# Altium PCB main_pcb_new_id.PcbDoc (part 2 of 2)
Units mil, origin at the board's own origin, x right, y up, seen from the top; angles counter-clockwise.
Board outline 3546.59 x 5237.31 mil, 2 copper layers (Top Layer, Bottom Layer); 115 components, 100 nets, 461 pads, 134 vias.
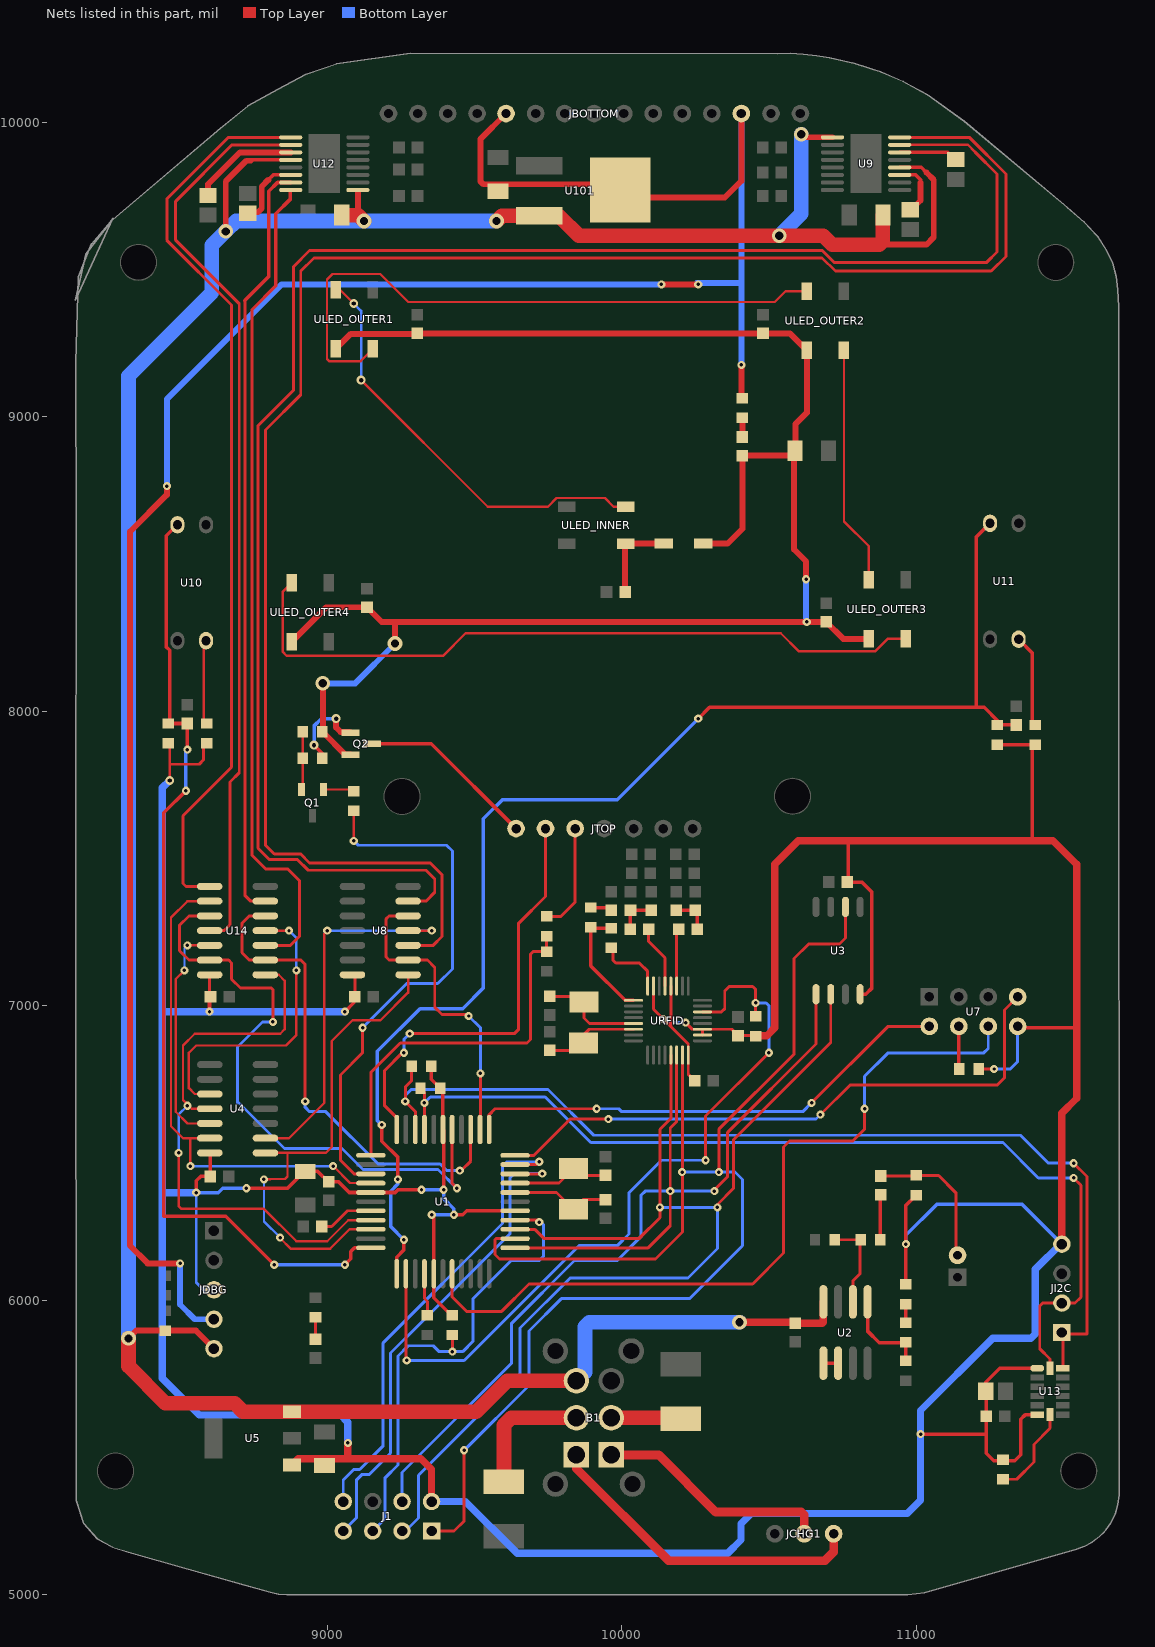
[diagram p2: the nets of this part, all layers, seen from the top]

## Via types
v1: diameter 27.56, hole 11.81, Top Layer to Bottom Layer, 97 vias
v2: diameter 50, hole 28, Top Layer to Bottom Layer, 17 vias
v3: diameter 25.98, hole 12.99, Top Layer to Bottom Layer, tented top, 8 vias
v4: diameter 30, hole 15, Top Layer to Bottom Layer, 7 vias
v5: diameter 20, hole 10, Top Layer to Bottom Layer, 3 vias
v6: diameter 27.6, hole 11.81, Top Layer to Bottom Layer, 2 vias

## Nets (pads, with @x,y where several pads share a name; then routed paths per layer and width w, separated by ;. In a path a pad name is that pad's centre, name@x,y a point inside that pad or via, vN(x,y) a via of type N, cw(c..) or ccw(c..) an arc to the next point about the centre after c; other vN are vias at no path point) (continued)
MISO: J1.1 U1.2 U3.2 URFID.31 | length 4691.7
  Top Layer w10: J1.1@9354.22,5215.85 9430.85,5215.85 9465,5250 v1(9465,5490) ; U1.2@9637.95,6208.55 9573.55,6208.55 9570,6205 9570,6155 9585,6140 10115,6140 10206.34,6231.34 URFID.31@10206.34,6832.4 ; v1(10330,6435) 10330,6580 10585,6835 10585,7160 10635,7210 10740,7210 10760.04,7230.04 U3.2@10760.04,7335.54
  Bottom Layer w10: v1(9465,5490) 9685,5710 9685,5895 9795,6005 10230,6005 10410,6185 10410,6410 10385,6435 v1(10330,6435) 10215,6435 10210,6430 v1(10205,6435)
MOSI: J1.4 U1.1 U3.5 URFID.30 | length 3674.8
  Top Layer w10: U1.1@9637.95,6177.55 10090,6177.55 10165,6252.55 v1(10165,6370) 10165,6585 10186.65,6606.65 URFID.30@10186.65,6832.4 ; v1(10315,6370) 10315,6375 10360,6420 10360,6570 10660.04,6870.04 U3.5@10660.04,7038.85
  Bottom Layer w10: J1.4@9254.22,5315.85 9254.22,5414.22 9625,5785 9625,5920 9840,6135 9985,6135 10065,6215 10065,6355 10080,6370 v1(10165,6370) v1(10315,6370)
MTR_L_DIR: U1.30 U4.11 U14.1 | length 1979.8
  Top Layer w8: v1(8495,6500) 8495,6320 8505,6310 8785,6310 8895,6200 9000,6200 9071.55,6271.55 U1.30@9147.95,6271.55 ; U4.11@8601.02,6650 8540,6650 8510,6680 8510,6865 8550,6905 8840,6905 8855,6920 8855,7085 8835,7105 U14.1@8789.49,7105
  Bottom Layer w8: v1(8495,6500) 8495,6630 v1(8525,6660)
MTR_L_EN: U1.14 U14.2 U14.5 | length 1678.3
  Top Layer w10: U14.5@8789.49,7305 8735,7305 8710,7280 8710,7180 8735,7155 U14.2@8789.49,7155 8910,7155 8925,7140 v1(8925,6675) ; v1(9450,6440) 9455,6440 9486.95,6471.95 U1.14@9486.95,6579.55
  Bottom Layer w10: v1(8925,6675) 8925,6655 8940,6640 8995,6640 9173,6462 9383.46,6462 9405.46,6440 v1(9450,6440)
MTR_L_ENC: C47.2 R21.1 U1.34 U11.3 | length 4490
  Top Layer w12: v1(9185,6595) 9185,6540 9240,6485 v1(9240,6410) ; U1.34@9235.95,6089.55 9235.95,6145.95 9260,6170 v1(9260,6205) ; v1(10260,7975) 10298.46,8013.46 11205,8013.46 ; U11.3@11251.12,8638.47 11205,8592.35 11205,8013.46 ; C47.2@11340,7953.5 11280.04,7953.5 11280,7953.46 11280,7965 11231.54,8013.46 11205,8013.46
  Bottom Layer w12: v1(9185,6595) 9170,6610 9170,6845 9315,6990 9460,6990 9530,7060 9530,7635 9595,7700 9985,7700 v1(10260,7975) ; v1(9240,6410) 9240,6395 9215,6370 9215,6250 v1(9260,6205)
MTR_R_DIR: U1.31 U4.1 U8.1 | length 1718.6
  Top Layer w8: v1(8785,6410) 8805,6410 8806.25,6411.25 8856.25,6411.25 8865,6420 8865,6500 ; U4.1@8790,6500 8865,6500 ; v1(8840,6212.5) 8840,6210 8875,6175 9010,6175 9075.55,6240.55 U1.31@9147.95,6240.55 ; U8.1@9274.49,7105 9274.49,7044.49 9180,6950 9131.46,6950 9130.68,6950.78 9085.78,6950.78 9015,6880 9015,6520 8995,6500 8865,6500
  Bottom Layer w8: v1(8785,6410) 8785,6267.5 v1(8840,6212.5)
MTR_R_EN: U1.13 U8.2 U8.5 | length 1053
  Top Layer w10: U8.5@9274.49,7305 9210,7305 9200,7295 9200,7165 9210,7155 U8.2@9274.49,7155 9340,7155 9365,7130 9365,6995 9390,6970 9475,6970 v1(9480,6965) ; U1.13@9518.95,6579.55 9520,6580.6 v1(9520,6770)
  Bottom Layer w10: v1(9480,6965) 9520,6925 v1(9520,6770)
MTR_R_ENC: C46.2 R20.1 U1.33 U10.3 | length 3268.9
  Top Layer w12: U10.3@8491.12,8633.47 8453.5,8595.84 8453.5,8218.28 8465,8206.78 8465,7963.46 8470,7958.46 8470.04,7958.5 C46.2@8525,7958.5 v1(8525,7870) ; v1(8520,7730) 8445,7655 8445,6285 8655,6285 v1(8820,6120) ; v6(9060,6120) 9080,6140 9080,6165 9092.55,6177.55 U1.33@9147.95,6177.55
  Bottom Layer w12: v1(8520,7730) 8520,7865 v1(8525,7870) ; v1(8820,6120) v6(9060,6120)
NetB1_1: B1.1 JCHG1.3 | length 1123.6
  Top Layer w30: B1.1@9846.2,5474.26 9846.2,5428.06 10159.25,5115 10690,5115 10720,5145 JCHG1.3@10720,5206.54
NetB1_2: B1.2 F1.2 | length 449.1
  Top Layer w50: F1.2@9600,5382.52 9600,5575 9625.24,5600.24 B1.2@9846.2,5600.24
NetB1_5: B1.5 F2.2 | length 241.2
  Top Layer w10: F2.2@10197.24,5600.24 F2.2@10200,5597.48
  Top Layer w50: B1.5@9960,5600 9960.24,5600.24 B1.5@9964.31,5600.24 F2.2@10197.24,5600.24
NetB1_6: B1.6 JCHG1.2 | length 803.8
  Top Layer w30: B1.6@9964.31,5474.26 10125.74,5474.26 10320,5280 10546.54,5280 10610,5280 10620,5270 JCHG1.2@10620,5206.54
NetC2_2: C2.2 U1.7 XTAL1.2 | length 344.4
  Top Layer w10: U1.7@9637.95,6365.55 9778.94,6365.55 XTAL1.2@9836.06,6308.43 9869.13,6341.5 C2.2@9945,6341.5
NetC3_1: C3.1 R11.1 | length 155.6
  Top Layer w12: R11.1@10878.46,6205 10878.46,6358.46 C3.1@10880,6360
NetC3_2: C3.2 MK1.1 R10.2 | length 501.9
  Top Layer w10: C3.2@10880,6421.5 10998.5,6421.5 R10.2@11000,6420 ; R10.2@11000,6423.46 11076.54,6423.46 11135,6365 11135,6150 MK1.1@11140,6145
NetC4_2: C4.2 U1.8 XTAL1.1 | length 337.4
  Top Layer w10: U1.8@9637.95,6397.55 9787.39,6397.55 XTAL1.1@9837.05,6447.2 9860.75,6423.5 C4.2@9945,6423.5
NetC7_1: C7.1 U1.29 | length 195.1
  Top Layer w10: C7.1@8975,6250 C7.1@8981.5,6250 9015,6250 9068.55,6303.55 U1.29@9147.95,6303.55
NetC9_1: C9.1 URFID.22 XRFID.2 | length 330.8
  Top Layer w10: C9.1@9755,6848.5 9846.14,6848.5 XRFID.2@9871.06,6873.43 9871.06,6901.06 9890,6920 URFID.22@10040,6920
NetC10_1: C10.1 URFID.21 XRFID.1 | length 350.6
  Top Layer w10: C10.1@9755,7031.5 9845.55,7031.5 9872.05,7005 9872.05,6957.95 9890.31,6939.69 URFID.21@10040,6939.69
NetC12_1: C12.1 D1.1 ULED_INNER.1 | length 284.4
  Top Layer w20: C12.1@10011.5,8415 10011.5,8566.26 ULED_INNER.1@10014.17,8568.94 10015.24,8570 D1.1@10143.07,8570
NetC21_1: C21.1 R16.1 | length 74.1
  Top Layer w12: R16.1@9895,7333.46 9955.04,7333.46 C21.1@9965,7323.5
NetC22_1: C22.1 C24.2 L2.2 | length 131.2
  Top Layer w12: C24.2@10185,7323.5 C22.1@10250,7323.5 10256.5,7317.01 L2.2@10256.5,7260
NetC25_2: C25.2 U9.11 | length 197.2
  Top Layer w12: U9.11@10944.17,9821.61 10998.39,9821.61 11015,9805 11015,9795
  Top Layer w20: C25.2@10980,9700 11015,9735 11015,9795
NetC30_2: C30.2 U9.14 | length 202.6
  Top Layer w12: U9.14@10944.17,9898.39 11106.61,9898.39 C30.2@11135,9870
NetC33_2: C33.2 U12.11 | length 365.7
  Top Layer w20: C33.2@8595,9750 C33.2@8595,9751.93 8595,9790 8703,9898 8875.44,9898 U12.11@8875.83,9898.39
NetC39_2: C39.2 U12.14 | length 242.2
  Top Layer w12: 8800,9805 8816.61,9821.61 U12.14@8875.83,9821.61
  Top Layer w20: C39.2@8730,9695 8765,9695 8777.53,9707.53 8777.53,9782.53 8800,9805
NetC42_1: C42.1 C45.1 L3.2 | length 134.1
  Top Layer w12: L3.2@10028.5,7260 10028.5,7322.01 C45.1@10030,7323.5 C42.1@10100,7323.5
NetDLED_2: DLED.2 R27.1 | length 75
  Top Layer w10: DLED.2@8960,5866.5 R27.1@8960,5941.54
NetJTOP_5: JTOP.5 R4.2 | length 366.8
  Top Layer w10: R4.2@9745,7303.46 9793.46,7303.46 9841.97,7351.97 JTOP.5@9841.97,7601.69
NetJTOP_7: JTOP.7 Q2.D | length 609.2
  Top Layer w12: Q2.D@9151.42,7890 9352.87,7890 JTOP.7@9641.18,7601.69
NetL1_1: L1.1 R28.1 | length 65
  Top Layer w20: L1.1@10410,8931.5 R28.1@10410,8996.54
NetL2_1: L2.1 URFID.11 | length 196.2
  Top Layer w10: URFID.11@10186.65,7066.65 10186.65,7253.15 L2.1@10193.5,7260
NetL3_1: L3.1 URFID.13 | length 216.5
  Top Layer w10: L3.1@10091.5,7260 10091.5,7218.5 10147.28,7162.72 URFID.13@10147.28,7066.65
NetQ1_1: Q1.1 R25.2 | length 96.8
  Top Layer w8: Q1.1@8987.4,7734.29 R25.2@9084.17,7734.29
NetQ1_2: Q1.2 R24.2 R26.1 | length 191.8
  Top Layer w8: Q1.2@8916.54,7738.23 R24.2@8916.54,7930
NetQ2_G: Q2.G R26.2 | length 276.5
  Top Layer w12: v4(8955,7885) R26.2@8983.46,7856.54
  Top Layer w20: v4(9030,7975) 9030,7945 9045,7930 9075.98,7930 Q2.G@9078.58,7927.4
  Bottom Layer w12: v4(8955,7885) 8955,7950 8980,7975 v4(9030,7975)
NetR1_1: R1.1 U1.37 | length 148.7
  Top Layer w10: U1.37@9329.95,6089.55 9329.95,6005.05 9340,5995 R1.1@9340,5948.46 R1.1@9340,5945
NetR8_1: R8.1 R11.2 U2.6 | length 326.7
  Top Layer w10: R8.1@10723.46,6205 R11.2@10820,6205 ; U2.6@10785,5994.33 10785,6065 10810,6090 10810,6195 R11.2@10820,6205 ; R11.2@10820,6210 R11.2@10820,6205
NetR12_2: R12.2 R13.1 U2.5 | length 305.9
  Top Layer w12: U2.5@10835,5994.33 10835,5895 10875,5855 10965,5855 R12.2@10965,5795
NetR13_2: R13.2 R14.1 | length 63.1
  Top Layer w12: R13.2@10965,5923.46 R14.1@10965,5986.54
NetR15_1: R15.1 R16.2 URFID.17 | length 396.1
  Top Layer w12: R15.1@9965,7263.46 9898.07,7263.46 R16.2@9895,7266.54 9895,7135 10011.57,7018.43 URFID.17@10040,7018.43
NetR15_2: R15.2 URFID.16 | length 225.7
  Top Layer w10: R15.2@9970,7196.54 9970,7155 9980,7145 10060,7145 10088.23,7116.77 URFID.16@10088.23,7066.65
NetR18_2: R18.2 U7.CH_PD | length 145.6
  Top Layer w12: U7.CH_PD@11145,6930 11145,6786.54 R18.2@11146.54,6785
NetR19_1: R19.1 U10.1 | length 293.9
  Top Layer w8: R19.1@8580,7958.46 8580,8231.52 U10.1@8588.25,8239.77 U10.1@8585,8236.52 ; R19.1@8585,7958.46 R19.1@8588.25,7961.71
NetR22_2: R22.2 U13.7 | length 319.1
  Top Layer w10: R22.2@11295,5391.54 11341.54,5391.54 11400,5450 11400,5510 11455,5565 11455,5610 U13.7@11460,5615
NetR23_1: R23.1 U11.1 | length 310.7
  Top Layer w12: U11.1@11348.25,8244.77 11395,8198.01 R23.1@11395,7953.46
NetU2_1: U2.1 U2.2 | length 50
  Top Layer w12: U2.1@10685,5785.67 U2.2@10735,5785.67
NetU4_2: U4.2 U8.4 | length 1274.4
  Top Layer w8: U4.2@8790,6550 8870,6550 8990,6670 8990,7245 v1(9000,7255) ; U8.4@9274.49,7255 v1(9355,7255)
  Bottom Layer w8: v1(9000,7255) v1(9355,7255)
NetU4_10: U4.10 U14.4 | length 1035
  Top Layer w8: U4.10@8601.02,6700 8550,6700 8530,6720 8530,6840 8555,6865 8860,6865 8895,6900 v1(8895,7120) ; U14.4@8789.49,7255 v1(8870,7255)
  Bottom Layer w8: v1(8870,7255) 8895,7230 v1(8895,7120)
NetU4_12: U4.12 U14.12 | length 789.5
  Top Layer w8: v1(8515,7120) 8485.22,7090.22 8485.22,6639.78 8525,6600 U4.12@8601.02,6600 ; v1(8525,7205) U14.12@8600.51,7205
  Bottom Layer w8: v1(8515,7120) 8515,7195 v1(8525,7205)
NetU8_3: U8.3 U9.16 | length 6131.6
  Top Layer w8: U8.3@9274.49,7205 U8.3@9279.49,7200
  Top Layer w10: U8.3@9274.49,7205 9360,7205 9390,7235 9390,7445 9350,7485 8940,7485 8910,7515 8820,7515 8790,7545 8790,8955 8910,9075 8910,9495 8955,9540 10680.8,9540 10725.8,9495 11255,9495 11305,9545 11305,9825 11180.43,9949.57 U9.16@10944.17,9949.57
NetU8_6: U8.6 U9.15 | length 5895.4
  Top Layer w8: U9.15@10944.17,9923.98 11176.02,9923.98 11200,9900
  Top Layer w10: U8.6@9274.49,7355 9335,7355 9365,7385 9365,7430 9335,7460 8935,7460 8899,7496 8804,7496 8765,7535 8765,8970 8885,9090 8885,9510 8940,9565 10681.26,9565 10721.26,9525 11240,9525 11275,9560 11275,9825 11201,9899
NetU12_9: U12.9 U14.8 | length 3086.8
  Top Layer w10: U14.8@8600.51,7405 8520,7405 8510,7415 8510,7645 8675,7810 8675,9380 8455,9600 8455,9740 8664.57,9949.57 U12.9@8875.83,9949.57
NetU12_10: U12.10 U14.11 | length 3107.5
  Top Layer w10: U14.11@8600.51,7255 8650,7255 8670,7275 8670,7760 8701,7791 8701,9384 8485,9600 8485,9732.12 8676.85,9923.98 U12.10@8875.83,9923.98
NetU12_15: U12.15 U14.6 | length 2589.6
  Top Layer w10: 8720,9395 8720,7375 8740,7355 U14.6@8789.49,7355
  Top Layer w12: 8720,9395 8801.53,9476.53 8801.53,9766.53 8831.02,9796.02 U12.15@8875.83,9796.02
NetU12_16: U12.16 U14.3 | length 2827.8
  Top Layer w10: U14.3@8789.49,7205 8875,7205 8905,7235 8905,7425 8865,7465 8790,7465 8745,7510 8745,9365 8825,9445
  Top Layer w12: 8825,9445 8825,9690 8875,9740 8875,9769.61 U12.16@8875.83,9770.43
NetULED_INNER_2: ULED_INNER.2 ULED_OUTER1.4 | length 1452.7
  Top Layer w8: ULED_OUTER1.4@9028.94,9431.61 9043.39,9431.61 v4(9090,9385) ; v4(9115,9125) 9545.08,8694.92 9749.17,8694.92 9778.89,8724.64 9942.87,8724.64 9972.59,8694.92 ULED_INNER.2@10014.17,8694.92
  Bottom Layer w8: v4(9090,9385) 9115,9360 v4(9115,9125)
NetULED_OUTER1_2: ULED_OUTER1.2 ULED_OUTER2.4 | length 2137.7
  Top Layer w8: ULED_OUTER1.2@9154.92,9230.83 9113.39,9189.3 9006.25,9189.3 8999.22,9196.33 8999.22,9466.11 9018.11,9485 9180,9485 9275,9390 10520,9390 10556.61,9426.61 ULED_OUTER2.4@10628.94,9426.61
NetULED_OUTER2_2: ULED_OUTER2.2 ULED_OUTER3.4 | length 814
  Top Layer w8: ULED_OUTER2.2@10754.92,9225.83 10754.92,8645.08 10838.94,8561.06 ULED_OUTER3.4@10838.94,8446.61
NetULED_OUTER3_2: ULED_OUTER3.2 ULED_OUTER4.4 | length 2443.1
  Top Layer w8: ULED_OUTER4.4@8878.94,8436.61 8849.22,8406.9 8849.22,8201.33 8862.55,8188 9393,8188 9470,8265 10540,8265 10600.7,8204.3 10861.62,8204.3 10903.15,8245.83 ULED_OUTER3.2@10964.92,8245.83
RESET: J1.5 R9.2 U1.4 | length 1632.5
  Top Layer w10: v1(9425,5825) R9.2@9425,5881.54 ; U1.4@9637.95,6271.55 9713.45,6271.55 v1(9720,6265)
  Bottom Layer w10: J1.5@9154.22,5215.85 9196.74,5258.38 9196.74,5396.74 9240,5440 9240,5810 9275,5845 9360,5845 9380,5825 v1(9425,5825) 9460,5825 9495,5860 9495,6005 9625,6135 9720,6135 9735,6150 9735,6255 9725,6265 v1(9720,6265)
RESET_RFID: R17.2 U1.35 URFID.6 | length 2684.5
  Top Layer w10: U1.35@9266.95,6089.55 9266.95,5798.05 v1(9270,5795) ; URFID.6@10274.25,6979.06 10339.06,6979.06 10350,6990 10350,7050 10365,7065 10445,7065 10455,7055 v1(10455,7009.23) R17.2@10455,6963.46 ; v1(10285,6475) 10285,6625 v1(10500,6840)
  Bottom Layer w10: v1(9270,5795) 9465,5795 9855,6185 9985,6185 10025,6225 10025,6365 10135,6475 v1(10285,6475) ; v1(10455,7009.23) 10490.77,7009.23 10500,7000 v1(10500,6840)
RST_WIFI: U1.40 U7.RST | length 2686.1
  Top Layer w10: U1.40@9423.95,6089.55 9423.95,6011.05 9473,5962 9592.46,5962 9685.46,6055 10445,6055 10550,6160 10550,6520 10570,6540 10785,6540 10825,6580 v1(10825,6650) v1@10825,6655
  Bottom Layer w10: v1(10825,6650) 10825,6760 10905,6840 11230,6840 11245,6855 U7.RST@11245,6930
RXD_FTDI: J1.8 U1.10 | length 1593.1
  Top Layer w10: J1.8@9054.22,5315.85 J1.8@9055,5315.07 ; U1.10@9637.95,6460.55 9710.55,6460.55 v1(9720,6470)
  Bottom Layer w10: J1.8@9054.22,5315.85 9054.22,5389.22 9090,5425 9110,5425 9190,5505 9190,5855 9595,6260 9595,6455 9610,6470 v1(9720,6470)
RXD_WIFI: U1.12 U7.TXD | length 1678
  Top Layer w10: U1.12@9549.95,6579.55 9549.95,6629.95 9570,6650 v1(9915,6650) ; v1(10645,6670) 10905,6930 U7.TXD@11045,6930
  Bottom Layer w10: v1(9915,6650) 9990,6650 10000,6640 10615,6640 v1(10645,6670)
SCK: J1.3 U1.3 U3.6 URFID.29 | length 3975.2
  Top Layer w10: J1.3@9254.22,5215.85 J1.3@9265.85,5215.85 ; U1.3@9637.95,6240.55 9704.45,6240.55 9735,6210 10060,6210 10130,6280 v1(10130,6315) 10130,6580 10166.97,6616.97 URFID.29@10166.97,6832.4 ; v1(10325,6315) 10325,6325 10380,6380 10380,6545 10710.04,6875.04 U3.6@10710.04,7038.85
  Bottom Layer w10: J1.3@9254.22,5215.85 9265.85,5215.85 9310,5260 9310,5405 9655,5750 9655,5905 9825,6075 10225,6075 10325,6175 v1(10325,6315) v1(10130,6315)
SCL: JI2C.2 R6.1 U1.19 U13.14 | length 3270.5
  Top Layer w10: R6.1@9316.54,6720 9316.54,6718.46 9329.95,6705.05 v1(9329.95,6670) U1.19@9329.95,6579.55 ; U13.14@11455,5765 U13.14@11455,5768.74 11455,5800 11420,5835 11420,5980 11430,5990 JI2C.2@11495,5990 11540,5990 11560,6010 11560,6390 v1(11535,6415)
  Bottom Layer w10: v1(9329.95,6670) 9349.95,6690 9740,6690 9895,6535 11295,6535 11415,6415 v1(11535,6415)
SDA: JI2C.1 R7.1 U1.20 U13.13 | length 3426.5
  Top Layer w10: 9286.54,6775 9286.54,6745.79 9265,6724.25 v1(9265,6675) 9298.95,6641.05 U1.20@9298.95,6579.55 ; U13.13@11498.31,5768.74 11498.31,5881.69 11495,5885 11580,5885 11580,6420 v1(11535,6465)
  Bottom Layer w10: v1@9270,6675 v1(9265,6675) 9265,6695 9285,6715 9750,6715 9905,6560 11355,6560 11450,6465 v1(11535,6465)
SPK_DIR: U1.26 U4.13 U14.9 | length 1743.3
  Top Layer w8: v1(8535,6455) 8535,6550 ; U14.9@8600.51,7355 8525,7355 8469.22,7299.22 8469.22,6590.78 8510,6550 U4.13@8601.02,6550 ; v1(9020,6455) 9077.45,6397.55 U1.26@9147.95,6397.55
  Bottom Layer w8: v1(8535,6455) v1(9020,6455)
SPK_EN: U1.16 U14.10 U14.13 | length 2134
  Top Layer w10: U14.10@8600.51,7305 8530,7305 8498.22,7273.22 8498.22,7186.78 8530,7155 U14.13@8600.51,7155 8665,7155 8675,7145 8675,7090 8705,7060 8810,7060 8815,7055 v1(8815,6945) ; U1.16@9423.95,6579.55 9423.22,6578.82 9423.22,6396.78 v1(9440,6380)
  Bottom Layer w10: 8695,6670 8695,6860 8780,6945 v1(8815,6945) ; 8695.51,6674.49 8855,6515 9050,6515 9121,6444 9376,6444 v1(9440,6380)
TXD_FTDI: J1.7 U1.9 | length 1657.3
  Top Layer w10: U1.9@9637.95,6428.55 9728.55,6428.55 v1(9730,6430)
  Bottom Layer w10: J1.7@9054.22,5215.85 9100,5261.63 9100,5390 9117,5407 9142,5407 9215,5480 9215,5820.46 9262.54,5868 9263,5868 9620,6225 9620,6415 9635,6430 v1(9730,6430)
TXD_WIFI: U1.11 U7.RXD | length 2064.8
  Top Layer w10: U1.11@9637.95,6491.55 9701.55,6491.55 9825,6615 v1(9955,6615) ; v1(10675,6630) 10775,6730 11275,6730 11300,6755 11300,6985 U7.RXD@11345,7030
  Bottom Layer w10: v1(9955,6615) 10660,6615 v1(10675,6630)
ULTRA_ECHO: R4.1 R5.1 U1.23 | length 1271.4
  Top Layer w10: U1.23@9147.95,6491.55 9147.95,6772.95 9248.22,6873.22 9678.22,6873.22 9690,6885 9690,7175 9698.46,7183.46 R5.1@9745,7183.46 R4.1@9745,7236.54
ULTRA_PWR: R25.1 U1.25 | length 1845.6
  Top Layer w10: v1(9090,7560) R25.1@9090,7661.54 R25.1@9090,7665 ; v1(9120,6925) 9120,6840 9045,6765 9045,6475 9091.45,6428.55 U1.25@9147.95,6428.55
  Bottom Layer w10: v1(9090,7560) 9105,7545 9405,7545 9425,7525 9425,7125 9375,7075 9270,7075 v1(9120,6925)
ULTRA_TRIG: JTOP.6 U1.22 | length 1479.3
  Top Layer w10: U1.22@9235.95,6579.55 9235.95,6619.05 9195,6660 9195,6780 9255,6840 v1(9260,6840) ; v1(9280,6905) 9635,6905 9650,6920 9650,7280 9741.18,7371.18 JTOP.6@9741.18,7601.69
  Bottom Layer w10: v1@9256.91,6840 v1(9260,6840) 9260,6885 v1(9280,6905)
V3: C5.2 C6.1 C8.1 C17.1 C18.2 C19.2 C29.1 C32.1 C36.1 C37.1 C48.1 J1.2 JDBG.3 JI2C.4 R6.2 R7.2 R9.1 R10.1 R14.2 R17.1 R18.1 R19.2 R20.2 R21.2 R22.1 R23.2 U1.5 U1.17 U1.27 U1.38 U3.8 U4.14 U5.1 U7.VCC U8.14 U13.1 U13.6 U14.14 URFID.2 URFID.3 URFID.12 URFID.15 URFID.32 | length 17771.7
  Top Layer w10: v4(8465,7765) 8465,7820 ; R20.2@8470,7891.54 8465,7886.54 8465,7820 ; R19.2@8580,7891.54 8580,7835 8565,7820 8465,7820 ; U14.14@8600.51,7105 8600.51,7032.99 C32.1@8603.5,7030 ; U4.14@8601.02,6500 U4.14@8602.01,6499.02 ; U8.14@9085.51,7105 9093.5,7097.01 C48.1@9093.5,7030 ; v1(9355,6290) v1@9361.95,6283.05 ; R6.2@9383.46,6720 R6.2@9392.95,6710.51 ; U1.17@9392.95,6579.55 U1.17@9395,6577.5 ; URFID.15@10107.91,7066.65 10107.91,6988.29 10166.97,6929.24 ; URFID.12@10166.97,7066.65 10166.97,6929.24 ; v1(10217.27,6942.27) 10217.73,6942.27 10240,6920 URFID.3@10274.25,6920 ; C19.2@10248.5,6745 10226.02,6767.48 URFID.32@10226.02,6832.4 10226.02,6870.18 10166.97,6929.24 ; URFID.2@10274.25,6900.31 URFID.3@10274.25,6920 ; R17.1@10455,6896.54 10453.03,6898.5 C18.2@10395,6898.5 10373.5,6920 URFID.3@10274.25,6920 ; R18.1@11213.46,6785 v1(11265,6785)
  Top Layer w12: v1(8555,6365) 8555,6405 8570,6420 C29.1@8602.01,6420 U4.14@8602.01,6499.02 ; v1(8600,6980) C32.1@8600,7025 ; v1(8725,6380) 8865,6380 C5.2@8920,6435 ; C5.2@8925,6437.09 8967.91,6437.09 C6.1@9005,6400 ; C6.1@9005,6401.93 9038.07,6401.93 9074.45,6365.55 U1.27@9147.95,6365.55 9230.55,6365.55 9240,6375 v1(9320,6375) ; v1(9060,6980) 9090,7010 C48.1@9090,7030 ; 9353.46,6775 9353.46,6750 R6.2@9383.46,6720 ; v1@9361.95,6283.05 U1.38@9361.95,6089.55 9361.95,6008.05 R9.1@9430,5940 ; U1.17@9392.95,6579.55 R6.2@9392.95,6710.51 ; v1(9395,6375) U1.17@9395,6577.5 ; v1(9430,6290) 9460,6290 9473.55,6303.55 U1.5@9637.95,6303.55 ; 10770,7560 10770,7423.5 C8.1@10766.5,7420 10815,7420 10850,7385 10850,7060 10828.85,7038.85 U3.8@10810.04,7038.85 ; R14.2@10965,6055 v1(10965,6190) 10965,6321.54 R10.1@11000,6356.54 ; v1(11015,5545) 11238.5,5545 ; R21.2@11280,7886.54 11395,7886.54 11395,7560 ; U7.VCC@11350,6925 11545,6925 ; U13.1@11411.69,5768.74 11283.74,5768.74 11236.54,5721.54 C36.1@11236.54,5690 11238.5,5688.03 C37.1@11238.5,5605 11238.5,5545 ; U13.6@11415,5610 11370,5610 11355,5595 11355,5475 11335,5455 11263.5,5455 11238.5,5480 11238.5,5545
  Top Layer w25: U5.1@8879.87,5440.05 8901.36,5461.54 9070,5461.54 ; v1(9070,5515) 9070,5461.54 ; J1.2@9354.22,5315.85 9354.22,5425.78 9318.46,5461.54 9070,5461.54 ; R17.1@10455,6896.54 10456.97,6898.5 10493.5,6898.5 10520,6925 10520,7480 10600,7560 10770,7560 11395,7560 11465,7560 11545,7480 11545,6925 11545,6685 11495,6635 JI2C.4@11495,6190
  Bottom Layer w10: v1(8555,6365) 8555,6060 8580,6035 JDBG.3@8615,6035 ; v1(10140,6955) 10152.73,6942.27 v1(10217.27,6942.27) ; v1(11265,6785) 11320,6785 11345,6810 U7.VCC@11345,6930
  Bottom Layer w12: v1(8555,6365) 8630,6365 8645,6380 v1(8725,6380) ; v1(9320,6375) v1(9395,6375) 9395,6345 9430,6310 v1(9430,6290) v1(9355,6290) ; v1(10965,6190) 10965,6220 11070,6325 11360,6325 11492.5,6192.5 JI2C.4@11495,6190
  Bottom Layer w25: v4(8465,7765) 8440,7740 8440,6980 ; v1(8555,6365) 8440,6365 ; v1(9060,6980) v1(8600,6980) 8440,6980 ; v1(9070,5515) 9070,5585 9045,5610 8565,5610 8440,5735 8440,6365 ; J1.2@9354.22,5315.85 9469.15,5315.85 9645,5140 10360,5140 10405,5185 10405,5240 10440,5275 10970,5275 11015,5320 v1(11015,5545) 11015,5625 11260,5870 11390,5870 11405,5885 11405,6105 JI2C.4@11492.5,6192.5 ; JI2C.4@11495,6190 JI2C.4@11495,6195 ; 8440,6365 8440,6980
V5: C51.2 JBOTTOM.5 JBOTTOM.13 JDBG.4 R28.2 U101.2 | length 7918.6
  Top Layer w20: v1(8455,8765) 8455,8735 8330,8610 8330,6185 8390,6125 v1(8500,6125) ; JBOTTOM.5@9607.17,10030.32 9520,9943.15 9520,9800 9530,9790 9580,9790 9975,9790 U101.2@9995,9770 10020,9745 10350,9745 10406.38,9801.38 JBOTTOM.13@10406.38,10030.32 ; v1(10135,9450) v1(10260,9450) ; v1(10406.38,9176.38) 10406.38,9067.09 R28.2@10410,9063.46
  Bottom Layer w20: v1(8455,8765) 8455,9060 8845,9450 v1(10135,9450) ; v1(8500,6125) 8500,5985 8550,5935 JDBG.4@8615,5935 ; v1(10260,9450) 10255,9455 10406.38,9455 ; v1(10406.38,9176.38) 10406.38,9455 ; JBOTTOM.13@10406.38,10030.32 10406.38,9455
VBATT: B1.3 C1.1 C23.2 C31.2 JDBG.5 R3.2 U2.8 U5.3 U9.1 U9.12 U12.1 U12.12 U101.3 | length 11017.6
  Top Layer w12: 8740,9870 8742.8,9872.8 U12.12@8875.83,9872.8 ; U12.1@9104.17,9764.17 U12.1@9104.17,9770.43 ; v2@10530,9615 v2(10535,9615) ; v2(10610,9960) 10614.13,9960 v2@10624.57,9949.57 ; U9.12@10944.17,9847.2 11017.8,9847.2 11035,9830
  Top Layer w20: v2(8325,5870) 8351.54,5896.54 8553.46,5896.54 JDBG.5@8615,5835 ; v2(8655,9630) 8655,9800 8725,9870 8740,9870 ; 9104.17,9685 U12.1@9104.17,9764.17 ; v2@9122.5,9662.5 v2@9125,9660 ; v2@10624.57,9949.57 U9.1@10715.83,9949.57 ; 10875,9585 11035,9585 11060,9610 11060,9805 11035,9830
  Top Layer w25: v2(10400,5925) 10590,5925 C1.1@10593.5,5921.5 ; C1.1@10595,5920 C1.1@10593.5,5921.5 ; U2.8@10685,5994.33 10685,5925 10681.5,5921.5 C1.1@10593.5,5921.5
  Top Layer w50: v2(8325,5870) 8325,5775 8450,5650 8685,5650 8713.85,5621.15 U5.3@8879.87,5621.15 9506.15,5621.15 9611.22,5726.22 B1.3@9846.2,5726.22 ; C31.2@9049.17,9685 9104.17,9685 9105,9685 v2(9125,9665) ; v2(9575,9665) 9593.39,9683.39 U101.3@9719.41,9683.39 9786.61,9683.39 9855,9615 v2@10530,9615 ; v2(10535,9615) 10685,9615 10715,9585 10875,9585 ; 10880,9590 10887.09,9597.09 C23.2@10887.09,9685
  Bottom Layer w50: v2(8325,5870) 8325,9138.95 8607.8,9421.75 8607.8,9582.8 v2(8655,9630) 8690,9665 v2(9125,9665) v2(9575,9665) ; B1.3@9846.2,5726.22 9875,5755.03 9875,5910 9890,5925 v2(10400,5925) ; v2(10535,9615) 10610,9690 v2(10610,9960)
VLEDS: C11.1 C13.1 C14.1 C15.1 C16.1 D1.2 L1.2 Q2.S R24.1 ULED_OUTER1.1 ULED_OUTER2.1 ULED_OUTER3.1 ULED_OUTER4.1 | length 5908
  Top Layer w20: ULED_OUTER4.1@8878.94,8235.83 8996.61,8353.5 C16.1@9135,8353.5 9185.04,8303.46 9230,8303.46 ; v2(8985,8095) 8985,7931.54 R24.1@8983.46,7930 9060.87,7852.6 Q2.S@9078.58,7852.6 ; ULED_OUTER1.1@9028.94,9230.83 9080,9281.89 9303.39,9281.89 C13.1@9305,9283.5 10571.26,9283.5 ULED_OUTER2.1@10628.94,9225.83 10628.94,9013.94 10590,8975 C11.1@10590,8880 ; v2(9230,8230) 9230,8303.46 ; D1.2@10276.93,8570 10360,8570 10410,8620 L1.2@10410,8868.5 10573.5,8868.5 C11.1@10590,8885 ; C11.1@10585,8875 10585,8550 10626.54,8508.46 v1(10626.54,8448.46) ; ULED_OUTER3.1@10838.94,8245.83 10752.68,8245.83 C15.1@10695,8303.5 v1(10628.46,8303.46) v1(10628.46,8303.46) 9230,8303.46
  Bottom Layer w20: v2(8985,8095) 9095,8095 v2(9230,8230) ; v1(10626.54,8448.46) 10626.54,8303.46 v1(10628.46,8303.46)
pads on no net: B1.0 B1.4 U3.3 U3.7 U4.4 U4.6 U4.8 U7.GPIO2 U8.8 U8.11 U9.5 U9.7 U9.8 U12.8 U13.3 U13.9 U13.10 U13.11 U13.12 ULED_OUTER4.2 URFID.7 URFID.8 URFID.9 URFID.19 URFID.20 URFID.25 URFID.26 URFID.27 URFID.28
copper on no net: | length 4180
  Top Layer w20: 94000,97935 98180,97935

## Polygon pours and split planes (outlines as drawn)
ANT_GND on Bottom Layer "ANT_GND" (solid, pour order 2): 11325,6420 11325,6000 11180,5855 10990,5665 10865,5665 10565,5665 10560,5660 10550,5670 10550,6040 10550,6080 10610,6140 10610,6360 10610,6410 10660,6460 10680,6480 11270,6480
no net on Mechanical 1 "Bottom Layer-No Net" (hatched 90Degree grid 80 track 8): 11535,9700 10904.84,9539.28 11074.24,8914.88 11685,9445
no net on Mechanical 1 "Bottom Layer-No Net" (hatched 90Degree grid 80 track 8): 8866.68,9514.78 8271.79,9670.14 8150,9420 8738.64,8887.77

## Keep-outs
Keep-Out Layer:
  lines w0.5: 8145.22,9398.7 cw(c8499.55,9398.7) 8271.79,9670.14 ; 8807.69,5006.05 ccw(c8861.77,5195.33) 8861.77,4998.48 ; 10530.9,10234.7 cw(c10530.9,9250.45) 11163.56,10004.43 ; 10971.98,4998.48 ccw(c10971.98,5195.33) 11026.06,5006.05 ; 11545.76,5154.53 ccw(c11491.68,5343.81) 11688.53,5343.81
  lines w0.51: 8145.22,9398.71 8145.22,5343.81 ccw(c8342.07,5343.81) 8287.99,5154.53 8807.69,5006.05 ; 8271.79,9670.14 8670.18,10004.43 cw(c9302.85,9250.45) 9302.85,10234.7 9916.87,10234.7 10530.9,10234.7 ; 8861.77,4998.48 9852.5,4998.48 ; 8889.26,4998.48 9488.24,4998.48 ; 9830,4998.48 10427.82,4998.48 10817.58,4998.48 10971.98,4998.48 ; 11026.06,5006.05 11545.76,5154.53 ; 11163.57,10004.43 11561.96,9670.14 cw(c11334.2,9398.7) 11688.53,9398.7 11688.53,5343.81
  lines w3.94: 9755,8074 9755,8210 ; 10075,8075 10075,8210
  lines w7.87: 9755,8074 10075,8074 ; 9755,8211.79 10075,8211.79 ; 9500.76,8777.79 10327.53,8777.79 ; 9500.76,8777.79 9500.76,9053.38 ; 9500.76,8777.79 10327.53,8777.79 ; 9500.76,8777.79 9500.76,9053.38 ; 9500.76,8777.79 9500.76,9053.38 ; 9500.76,8777.79 10327.53,8777.79 ; 9500.76,9053.38 10327.53,9053.38 ; 9500.76,9053.38 10327.53,9053.38 ; 9500.76,9053.38 10327.53,9053.38 ; 10327.53,8777.79 10327.53,9053.38 ; 10327.53,8777.79 10327.53,9053.38 ; 10327.53,8777.79 10327.53,9053.38

## Other copper
Bottom Layer:
  rectangle net ANT_GND: 8940,9755 9045,9955
  rectangle net ANT_GND: 10775,9765 10880,9965

## Silkscreen, mask and mechanical layers (free items; w line width, h text height)
Top Overlay:
  drawing of 596 lines, arcs and shapes, not listed
  text "MLA" at 9320,10090 h30 r90
  text "GND" at 9420,10090 h30 r90
  text "ARMR" at 9525,10090 h30 r90
  text "5V" at 9620,10090 h30 r90
  text "SPKB" at 9720,10090 h30 r90
  text "SPKA" at 9815,10090 h30 r90
  text "B0V" at 9920,10090 h30 r90
  text "B7V" at 10010,10090 h30 r90
  text "B3V" at 10110,10090 h30 r90
  text "GND" at 10225,10090 h30 r90
  text "ARML" at 10310,10090 h30 r90
  text "5V" at 10415,10090 h30 r90
  text "MRB" at 10520,10090 h30 r90
  text "MRA" at 10630,10090 h30 r90
  text "MLB" at 9235,10080 h30 r90
  text "ULTRA_TRIG" at 9755,7675 h30 r90
  text "ULTRA_ECHO" at 9855,7675 h30 r90
  text "GND" at 9960,7675 h30 r90
  text "ANT_SIG_B" at 10055,7675 h30 r90
  text "GND" at 10155,7675 h30 r90
  text "ANT_SIG_A" at 10250,7675 h30 r90
  text "ULTRA_PWR" at 9670,7665 h30 r90
  text "Rodolfo Cossovich / Sean Purser-Haskell / Ivan Tchekashkin / 23 JUN 2016" at 10085,6265 h40
  text "GND" at 8685,6225 h30
  text "3V" at 11369.99,6175 h30
  text "DLED" at 8685,6125 h30
  text "GND" at 11340,6075 h30
  text "3V" at 8685,6025 h30
  text "SCL" at 11340,5975 h30
  text "5V" at 8685,5915 h30
  text "SDA" at 11340,5875 h30
  text "VBAT" at 8685,5825 h30
  text "GND" at 10530,5260 h30 r90
  text "B3V" at 10630,5260 h30 r90
  text "B7V" at 10740,5250 h30 r90
  text "XSP_header" at 9055,5115 h30
Bottom Overlay:
  text "MLB" at 9230,9865 h30 r90
  text "MLA" at 9315,9855 h30 r90
  text "GND" at 9415,9855 h30 r90
  text "ARMR" at 9520,9855 h30 r90
  text "5V" at 9615,9855 h30 r90
  text "SPKB" at 9715,9855 h30 r90
  text "SPKA" at 9810,9855 h30 r90
  text "B0V" at 9915,9855 h30 r90
  text "B7V" at 10005,9855 h30 r90
  text "B3V" at 10105,9855 h30 r90
  text "GND" at 10220,9855 h30 r90
  text "ARML" at 10305,9855 h30 r90
  text "5V" at 10410,9855 h30 r90
  text "MRB" at 10515,9855 h30 r90
  text "MRA" at 10625,9855 h30 r90
  text "ULTRA_PWR" at 9655,7400 h30 r90
  text "ULTRA_TRIG" at 9740,7390 h30 r90
  text "ULTRA_ECHO" at 9840,7390 h30 r90
  text "GND" at 9945,7390 h30 r90
  text "ANT_SIG_B" at 10040,7390 h30 r90
  text "GND" at 10140,7390 h30 r90
  text "ANT_SIG_A" at 10235,7390 h30 r90
  text "\"It is the child who makes the man, and no man exists who was not made by the child he once was.\"" at 9470,6770 h60
  text "B7V" at 10745,5500 h30 r90
  text "GND" at 10535,5490 h30 r90
  text "B3V" at 10635,5490 h30 r90
  text "XSP_header" at 9345,5380 h30
Mechanical 1:
  circle w0.5: c9254.16,7710.99 r118.11
  circle w0.5: c8280.6,5419.13 r118.11
  circle w0.5: c11552.45,5419.74 r118.11
  circle w0.5: c10579.42,7711.37 r118.11
  circle w0.5: c11474.26,9524.61 r118.11
  circle w0.5: c8359.49,9524.61 r118.11
  circle w5: c1198.91,1065.44 r1.7
  circle w5: c1198.91,1144.56 r1.7
  circle w5: c1152.87,1121.84 r4.33
  circle w5: c1152.86,1121.83 r1.7
  circle w5: c1152.87,1088.16 r4.33
  circle w5: c1152.86,1088.17 r1.7
  circle w5: c1094.65,1146.54 r1.7
  circle w5: c1094.65,1063.46 r1.7
  lines w5: 1083.95,1078.2 ccw(c1088.95,1078.2) 1084.14,1076.83 ; 1083.95,1131.8 cw(c1088.95,1131.8) 1084.14,1133.17 ; 1087.91,1063.63 ccw(c1092.72,1065) 1092.72,1060 ; 1195.72,1060 ccw(c1195.72,1069) 1202.61,1063.21 ; 1195.72,1150 cw(c1195.72,1141) 1202.61,1146.79 ; 1211.1,1073.33 ccw(c1191.95,1089.4) 1216.54,1084.89 ccw(c1191.95,1089.4) 1216.95,1089.4 ; 1211.1,1136.67 cw(c1191.95,1120.6) 1216.54,1125.11 cw(c1191.95,1120.6) 1216.95,1120.6 ; 1087.91,1146.37 cw(c1092.72,1145) 1092.72,1150 ccw(c1092.72,1145) 1087.91,1146.37
  lines w10: 9900,8065 8565,8060 8899.69,9615 10872.79,9615 11294.61,8060.15 9905,8060

## Text inside footprints (layer, text, board x,y; h text height)
J1: Bottom Overlay "2" at 9434.22,5295.85 h50; Bottom Overlay "1" at 9434.22,5195.85 h50; Bottom Overlay "7" at 8994.22,5195.85 h50; Bottom Overlay "8" at 8994.22,5295.85 h50